# Altium PCB 线圈2.PcbDoc
Units mm, origin at the board's own origin, x right, y up, seen from the top; angles counter-clockwise.
Board outline 152.4 x 101.6 mm, 2 copper layers (Top Layer, Bottom Layer); 2 components, 2 nets, 5 pads, 1 vias.
Unrouted connection lines stored in the file: 2.
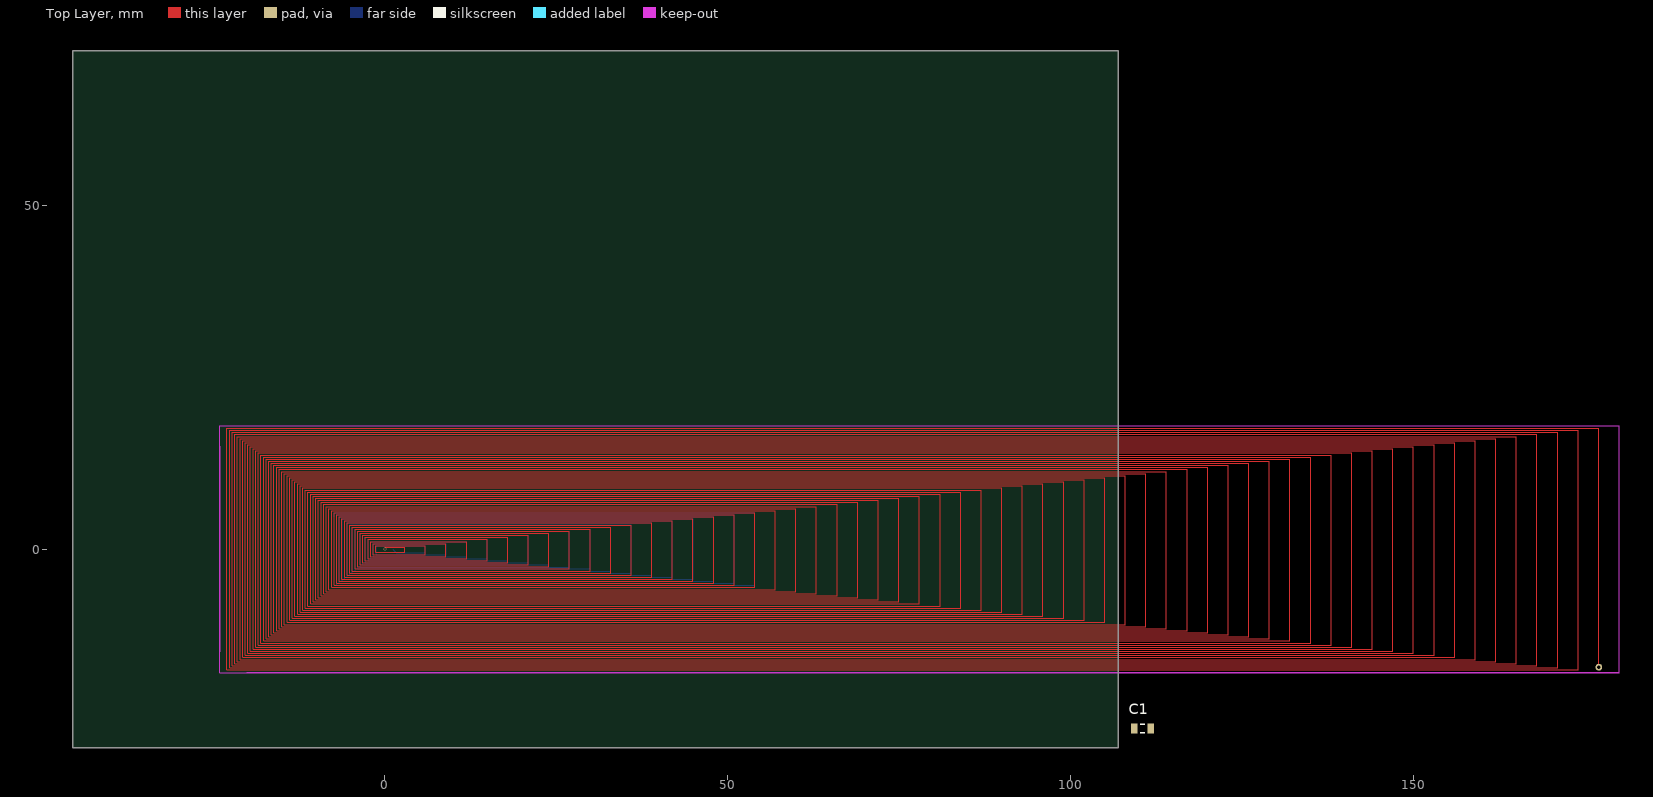
[diagram p0: Top Layer view]
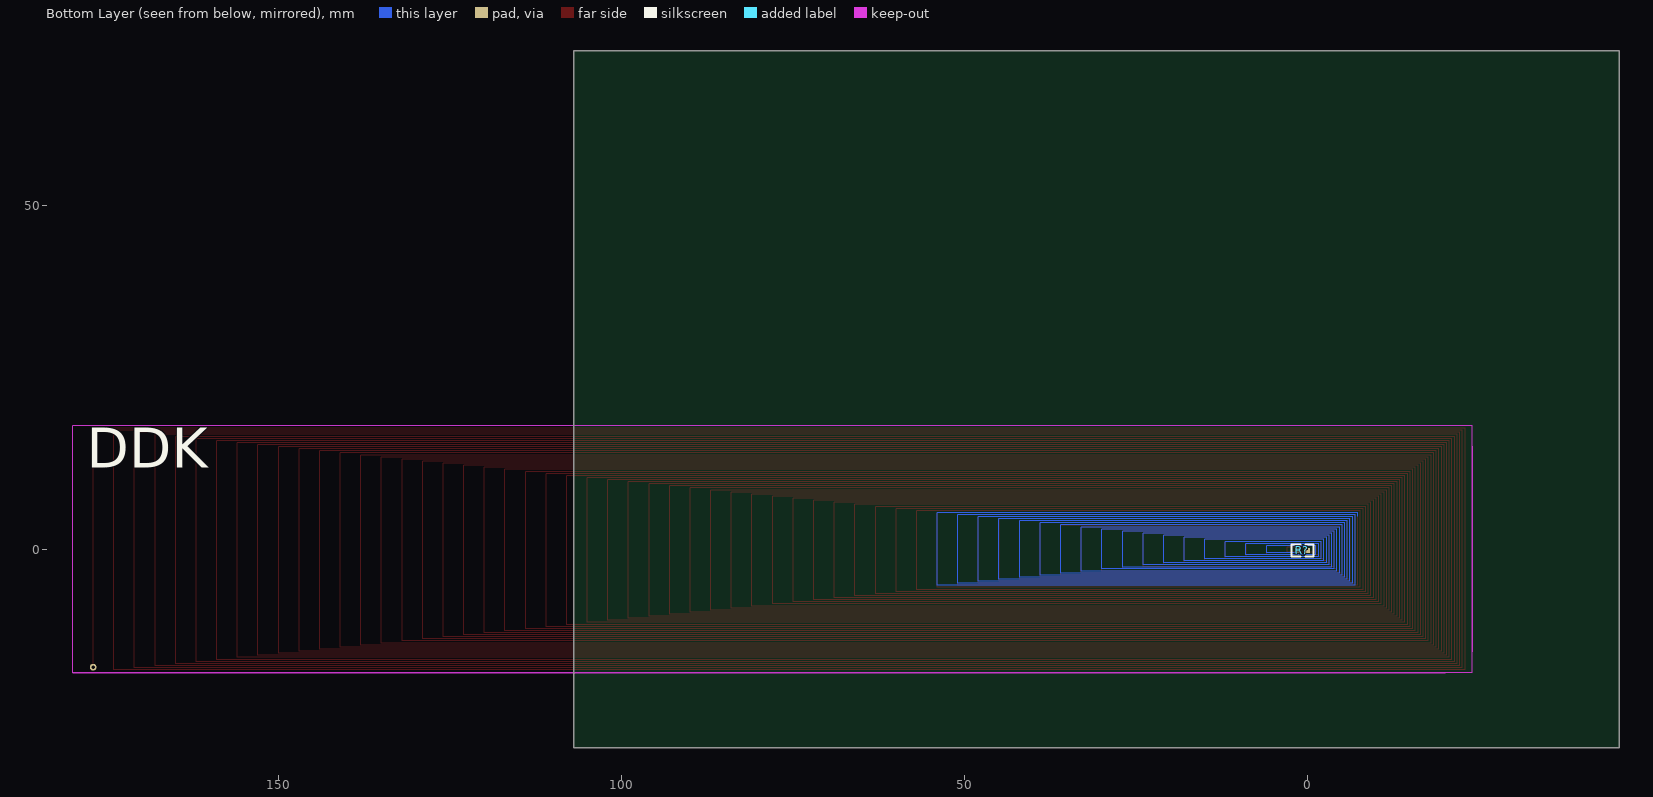
[diagram p1: Bottom Layer view, seen from below]

## Layer stack, top to bottom
Top Layer: signal copper 0.0356
Dielectric: dielectric 0.32, FR-4, Dk 4.8
Bottom Layer: signal copper 0.0356

## Board outline
-45.4,-28.97 107,-28.97 107,72.63 -45.4,72.63

## Design rules (kind name [scope] priority, off if disabled: settings)
Clearance [All] p1: gap=0.152
PolygonConnect [All] p1: connectstyle=Relief reliefconductorwidth=0.254 reliefentries=4 polygonreliefangle="90 Angle" airgapwidth=0.254
RoutingVias [All] p1: holewidth=0.711 width=1.27 viastyle="Through Hole" minholewidth=0.711 minwidth=1.27 maxholewidth=0.711 maxwidth=1.27
SolderMaskExpansion [All] p1: expansion=0.102
Width [All] p1: maxlimit=0.254 minlimit=0.152 preferedwidth=0.254 minimp=50.000000 maximp=50.000000 favimp=50.000000
28 further rules are at their usual default settings.

## Components (designator, comment, footprint, x,y, rotation, side; value= is the part's Value field where it differs from the comment)
C1 "Cap" C2012 110.505,-26.151 r0 top
R? "Res2" 0603 0.076,-0.203 r0 bottom

## Footprints (in the part's own frame and the unit in brackets; to place one, negate y for a bottom-side part, rotate by r counter-clockwise, add the part's x,y. Pads: shape width x height; smd on the part's side, far side on the other; paste and mask are expansions set on the pad)
0603 [mil]
  rect 30x30 smd: 1(0,0) 2(55,0)
  silkscreen extent -35,-35 90,35
C2012 [mm] "Chip Capacitor, 2-Leads, Body 2.0x1.2mm, IPC Low Density"
  rect 1x1.45 smd: 1(-1.2,0) 2(1.2,0)
  silkscreen extent -0.3,-0.63 0.3,0.63, body extent -0.98,-0.6 1.02,0.6, height 0.5

## Part data
C1: "Capacitor"
R?: "Resistor"

## Free pads (board coordinates)
  round 1 hole 0.5: 0(177.013,-17.221)

## Via types
v1: diameter 0.457, hole 0.305, Top Layer to Bottom Layer, 1 vias

## Nets (pads, with @x,y where several pads share a name; then routed paths per layer and width w, separated by ;. In a path a pad name is that pad's centre, name@x,y a point inside that pad or via, vN(x,y) a via of type N, cw(c..) or ccw(c..) an arc to the next point about the centre after c; other vN are vias at no path point)
LINE1: C1.1 R?.1 | length 13959.5
  Top Layer w0.152: -4.252,-2.9 -4.252,2.9 30,2.9 30,-3.2 -4.633,-3.2 -4.633,3.2 33,3.2 33,-3.5 -5.014,-3.5 -5.014,3.5 36,3.5 36,-3.8 -5.395,-3.8 -5.395,3.8 39,3.8 39,-4.1 -5.776,-4.1 -5.776,4.1 42,4.1 42,-4.4 -6.157,-4.4 -6.157,4.4 45,4.4 45,-4.7 -6.538,-4.7 -6.538,4.7 48,4.7 48,-5 -6.919,-5 -6.919,5 51,5 51,-5.3 -7.3,-5.3 -7.3,5.3 54,5.3 54,-5.6 -7.681,-5.6 -7.681,5.6 57,5.6 57,-5.9 -8.062,-5.9 -8.062,5.9 60,5.9 60,-6.2 -8.443,-6.2 -8.443,6.2 63,6.2 63,-6.5 -8.824,-6.5 -8.824,6.5 66,6.5 66,-6.8 -9.205,-6.8 -9.205,6.8 69,6.8 69,-7.1 -9.586,-7.1 -9.586,7.1 72,7.1 72,-7.4 -9.967,-7.4 -9.967,7.4 75,7.4 75,-7.7 -10.348,-7.7 -10.348,7.7 78,7.7 78,-8 -10.729,-8 -10.729,8 81,8 81,-8.3 -11.11,-8.3 -11.11,8.3 84,8.3 84,-8.6 -11.491,-8.6 -11.491,8.6 87,8.6 87,-8.9 -11.872,-8.9 -11.872,8.9 90,8.9 90,-9.2 -12.253,-9.2 -12.253,9.2 93,9.2 93,-9.5 -12.634,-9.5 -12.634,9.5 96,9.5 96,-9.8 -13.015,-9.8 -13.015,9.8 99,9.8 99,-10.1 -13.396,-10.1 -13.396,10.1 102,10.1 102,-10.4 -13.777,-10.4 -13.777,10.4 105,10.4 105,-10.7 -14.158,-10.7 -14.158,10.7 108,10.7 108,-11 -14.539,-11 -14.539,11 111,11 111,-11.3 -14.92,-11.3 -14.92,11.3 114,11.3 114,-11.6 -15.301,-11.6 -15.301,11.6 117,11.6 117,-11.9 -15.682,-11.9 -15.682,11.9 120,11.9 120,-12.2 -16.063,-12.2 -16.063,12.2 123,12.2 123,-12.5 -16.444,-12.5 -16.444,12.5 126,12.5 126,-12.8 -16.825,-12.8 -16.825,12.8 129,12.8 129,-13.1 -17.206,-13.1 -17.206,13.1 132,13.1 132,-13.4 -17.587,-13.4 -17.587,13.4 135,13.4 135,-13.7 -17.968,-13.7 -17.968,13.7 138,13.7 138,-14 -18.349,-14 -18.349,14 141,14 141,-14.3 -18.73,-14.3 -18.73,14.3 144,14.3 144,-14.6 -19.111,-14.6 -19.111,14.6 147,14.6 147,-14.9 -19.492,-14.9 -19.492,14.9 150,14.9 150,-15.2 -19.873,-15.2 -19.873,15.2 153,15.2 153,-15.5 -20.254,-15.5 -20.254,15.5 156,15.5 156,-15.8 -20.635,-15.8 -20.635,15.8 159,15.8 159,-16.1 -21.016,-16.1 -21.016,16.1 162,16.1 162,-16.4 -21.397,-16.4 -21.397,16.4 165,16.4 165,-16.7 -21.778,-16.7 -21.778,16.7 168,16.7 168,-17 -22.159,-17 -22.159,17 171,17 171,-17.3 -22.54,-17.3 -22.54,17.3 174,17.3 174,-17.6 -22.921,-17.6 -22.921,17.6 177,17.6 177,-17.145 ; -4.242,-2.896 27,-2.896 27,2.6 -3.871,2.6 -3.871,-2.6 24,-2.6 24,2.3 -3.49,2.3 -3.49,-2.3 21,-2.3 21,2 -3.109,2 -3.109,-2 18,-2 18,1.7 -2.728,1.7 -2.728,-1.7 15,-1.7 15,1.4 -2.347,1.4 -2.347,-1.4 12,-1.4 12,1.1 -1.966,1.1 -1.966,-1.1 9,-1.1 9,0.8 -1.585,0.8 -1.585,-0.8 6,-0.8 6,0.5 -1.204,0.5 -1.204,-0.5 2.997,-0.5 2.997,-0.305 ; v1@0,0 0.229,0.229 3,0.229 3,-0.5
  other v1: 0.102,0.025
LINE2: C1.2 R?.2 | length 1348.5
  Bottom Layer w0.152: -7.29,4.801 -7.29,5.309 54,5.309 54,-5.283 -6.909,-5.283 -6.909,5.004 51.003,5.004 51.003,-5.004 -6.553,-5.004 -6.553,4.699 48.006,4.699 48.006,-4.699 -6.147,-4.699 -6.147,4.394 45.009,4.394 45.009,-4.394 -5.766,-4.394 -5.766,4.115 42.012,4.115 42.012,-4.115 -5.385,-4.115 -5.385,3.81 39.014,3.81 39.014,-3.81 -5.029,-3.81 -5.029,3.505 35.992,3.505 35.992,-3.505 -4.648,-3.505 -4.648,3.2 32.995,3.2 32.995,-3.2 -4.242,-3.2 -4.242,2.896 30.023,2.896 30.023,-2.896 -3.861,-2.896 -3.861,2.616 27,2.616 27,-2.616 -3.505,-2.616 -3.505,2.311 24.003,2.311 24.003,-2.311 -3.124,-2.311 -3.124,2.007 21.006,2.007 21.006,-2.007 -2.743,-2.007 -2.743,1.702 18.009,1.702 18.009,-1.702 -2.337,-1.702 -2.337,1.397 14.986,1.397 14.986,-1.397 -1.981,-1.397 -1.981,1.092 12.014,1.092 12.014,-1.118 -1.6,-1.118 -1.6,0.787 9.017,0.787 9.017,-0.813 -1.194,-0.813 -1.194,0.483 5.994,0.483 5.994,-0.508 1.778,-0.508 R?.2@1.27,0

## Keep-outs
Keep-Out Layer:
  lines w0.152: -24,-15 -24,-18 -20,-18 ; -24,15 -24,18 180,18 180,-18
  lines w0.2: -24,-15 -24,15 ; -20,-18 180,-18

## Silkscreen, mask and mechanical layers (free items; w line width, h text height)
Bottom Overlay:
  text "DDK" at 177.927,9.881 h10